# EAGLE board test1 (EAGLE 7.6.0)

Size 101.6 x 53.34 mm. Coordinates in mm from the lower left corner, seen from the top.
Outline: 0,0 0,53.34 96.52,53.34 99.06,50.8 99.06,40.64 101.6,38.1 101.6,3.81 99.06,1.27 99.06,0 0,0
Copper layers (1*16): Top 0.035mm / dielectric 1.5mm / Bottom 0.035mm
Design rules "default *": minimum track width 8mil, minimum drill 16mil, track to track 8mil, track to pad 8mil, pad to pad 8mil, via to via 10mil, smd to smd 8mil, copper to edge 40mil, drill to drill 12mil, minimum pad ring 10mil, minimum via ring 10mil, stop-mask expansion 4mil, vias tented up to drill 0mil, thermal gap 10mil
Net classes: 0 default: width 0.203 mm, drill 0.406 mm, clearance 0.203 mm; 1 power: width 0.61 mm, drill 0.711 mm, clearance 0.203 mm; 2 gnd: width 0.305 mm, drill 0.711 mm, clearance 0.203 mm; 3 usbvcc: width 0.508 mm, drill 0.711 mm, clearance 0.203 mm
Holes 3.2 mm at 15.24,2.54 15.24,50.8 90.17,50.8 96.52,2.54

## Footprints (pad centres in the part's own frame; a part is rotated, then mirrored left to right if it is on the bottom)
1X08 = drill 1.016 long: 1 -8.89,0; 2 -6.35,0; 3 -3.81,0; 4 -1.27,0; 5 1.27,0; 6 3.81,0; 7 6.35,0; 8 8.89,0
C0805RND = smd 1.3 x 1.5: 1 -0.977,0; 2 0.977,0
SMC_D = smd 2.4 x 2.8: + -3.15,0; - 3.15,0
SMB = smd 2.4 x 2.4: A 2.2,0; C -2.2,0
L1812 = smd 1.9 x 3.4: 1 -1.95,0; 2 1.95,0
TQFP100 = smd 1.5 x 0.35: 1 -8,6; 2 -8,5.5; 3 -8,5; 4 -8,4.5; 5 -8,4; 6 -8,3.5; 7 -8,3; 8 -8,2.5; 9 -8,2; 10 -8,1.5; 11 -8,1; 12 -8,0.5; 13 -8,0; 14 -8,-0.5; 15 -8,-1; 16 -8,-1.5; 17 -8,-2; 18 -8,-2.5; 19 -8,-3; 20 -8,-3.5; 21 -8,-4; 22 -8,-4.5; 23 -8,-5; 24 -8,-5.5; 25 -8,-6; 51 8,-6; 52 8,-5.5; 53 8,-5; 54 8,-4.5; 55 8,-4; 56 8,-3.5; 57 8,-3; 58 8,-2.5; 59 8,-2; 60 8,-1.5; 61 8,-1; 62 8,-0.5; 63 8,0; 64 8,0.5; 65 8,1; 66 8,1.5; 67 8,2; 68 8,2.5; 69 8,3; 70 8,3.5; 71 8,4; 72 8,4.5; 73 8,5; 74 8,5.5; 75 8,6 | smd 0.35 x 1.5: 26 -6,-8; 27 -5.5,-8; 28 -5,-8; 29 -4.5,-8; 30 -4,-8; 31 -3.5,-8; 32 -3,-8; 33 -2.5,-8; 34 -2,-8; 35 -1.5,-8; 36 -1,-8; 37 -0.5,-8; 38 0,-8; 39 0.5,-8; 40 1,-8; 41 1.5,-8; 42 2,-8; 43 2.5,-8; 44 3,-8; 45 3.5,-8; 46 4,-8; 47 4.5,-8; 48 5,-8; 49 5.5,-8; 50 6,-8; 76 6,8; 77 5.5,8; 78 5,8; 79 4.5,8; 80 4,8; 81 3.5,8; 82 3,8; 83 2.5,8; 84 2,8; 85 1.5,8; 86 1,8; 87 0.5,8; 88 0,8; 89 -0.5,8; 90 -1,8; 91 -1.5,8; 92 -2,8; 93 -2.5,8; 94 -3,8; 95 -3.5,8; 96 -4,8; 97 -4.5,8; 98 -5,8; 99 -5.5,8; 100 -6,8
DPACK = smd 1 x 1.6: 1 -2.28,-4.8; 3 2.28,-4.8 | smd 5.4 x 6.2: 2 0,2.5
SSOP28 = smd 0.381 x 1.499: 1 -4.225,-3.625; 2 -3.575,-3.625; 3 -2.925,-3.625; 4 -2.275,-3.625; 5 -1.625,-3.625; 6 -0.975,-3.625; 7 -0.325,-3.625; 8 0.325,-3.625; 9 0.975,-3.625; 10 1.625,-3.625; 11 2.275,-3.625; 12 2.925,-3.625; 13 3.575,-3.625; 14 4.225,-3.625; 15 4.225,3.625; 16 3.575,3.625; 17 2.925,3.625; 18 2.275,3.625; 19 1.625,3.625; 20 0.975,3.625; 21 0.325,3.625; 22 -0.325,3.625; 23 -0.975,3.625; 24 -1.625,3.625; 25 -2.275,3.625; 26 -2.925,3.625; 27 -3.575,3.625; 28 -4.225,3.625
SO08 = smd 0.6 x 2.2: 1 -1.905,-2.6; 2 -0.635,-2.6; 3 0.635,-2.6; 4 1.905,-2.6; 5 1.905,2.6; 6 0.635,2.6; 7 -0.635,2.6; 8 -1.905,2.6
2X03 = drill 1.016 octagon: 1 -2.54,-1.27; 2 -2.54,1.27; 3 0,-1.27; 4 0,1.27; 5 2.54,-1.27; 6 2.54,1.27
2X08 = drill 1.016 octagon: 1 -8.89,-1.27; 2 -8.89,1.27; 3 -6.35,-1.27; 4 -6.35,1.27; 5 -3.81,-1.27; 6 -3.81,1.27; 7 -1.27,-1.27; 8 -1.27,1.27; 9 1.27,-1.27; 10 1.27,1.27; 11 3.81,-1.27; 12 3.81,1.27; 13 6.35,-1.27; 14 6.35,1.27; 15 8.89,-1.27; 16 8.89,1.27
1X01 = drill 1.016 octagon: 1 0,0
0805RND = smd 1.27 x 1.27: P$1 -1.143,0; P$2 1.143,0
1X06 = drill 1.016 long: 1 -6.35,0; 2 -3.81,0; 3 -1.27,0; 4 1.27,0; 5 3.81,0; 6 6.35,0
HC49/S = drill 0.813: 1 -2.413,0; 2 2.413,0
R0805RND = smd 1.3 x 1.5: 1 -0.977,0; 2 0.977,0
RCL_0805RND = smd 1.27 x 1.27: P$1 -1.143,0; P$2 1.143,0
SJ = smd 1.168 x 1.6: 1 -0.762,0; 2 0.762,0
B3F-10XX = drill 1.016 long: 1 -3.251,2.261; 2 3.251,2.261; 3 -3.251,-2.261; 4 3.251,-2.261
SOT223 = smd 1.219 x 2.235: 1 -2.311,-3.099; 2 0,-3.099; 3 2.311,-3.099 | smd 3.6 x 2.2: 4 0,3.099
FIDUCIA-MOUNT = smd 1.016 x 1.016: P$1 0,0
DC-21MM = drill 3.302 pad 4.826 octagon: 1 -5.08,-3.353; 2 -0.076,-6.35; 3 -0.076,-0.356
JP4 = drill 0.914 long: 1 -3.81,0; 2 -1.27,0; 3 1.27,0; 4 3.81,0
PN61729 = drill 0.95 octagon: 1 1.25,4.71; 2 -1.25,4.71; 3 -1.25,2.71; 4 1.25,2.71 | drill 2.2: P$1 -6,0; P$2 6,0

## Placement (x,y rotation side)
ADCH  [1X08]  82.55,2.54 0 top
ADCL  [1X08]  59.69,2.54 0 top
C1  100n  [C0805RND]  64.77,18.41 0 top
C2  22p  [C0805RND]  38.61,9.65 0 top
C3  22p  [C0805RND]  38.61,12.19 0 top
C4  100n  [C0805RND]  26.42,44.2 0 top
C5  100n  [C0805RND]  16.26,18.8 0 top
C6  100u  [SMC_D]  22.86,6.1 270 top
C7  100u  [SMC_D]  28.45,6.1 270 top
C9  100n  [C0805RND]  64.39,37.47 180 top
C10  100n  [C0805RND]  38.61,7.11 0 top
C11  22p  [C0805RND]  26.42,16.26 0 top
C12  100n  [C0805RND]  26.42,21.23 180 top
C13  100n  [C0805RND]  21.34,16.26 180 top
C14  100n  [C0805RND]  16.26,26.42 0 top
C15  100n  [C0805RND]  15.24,46.23 0 top
C16  100n  [C0805RND]  19.81,46.23 0 top
C17  100n  [C0805RND]  21.34,26.42 0 top
COMMUNICATION  [1X08]  77.47,50.8 180 top
D1  [SMB]  17.27,9.14 270 top
F1  500mA  [L1812]  18.29,30.48 0 top
IC2  ATMEGA1280-16AU  [TQFP100]  50.8,28.35 0 top
IC4  MC33269D-5.0  [DPACK]  6.99,17.78 90 top
IC6  FT232RL  [SSOP28]  18.29,39.12 0 top
IC7  LM358D  [SO08]  18.8,22.61 270 top
ICSP  ICSP  [2X03]  64.9,27.94 270 top
JP1  [2X08]  95.25,39.37 90 top
JP2  [2X08]  95.25,19.05 90 top
JP3  [1X01]  93.98,50.8 0 top
JP4  [1X01]  96.52,50.8 0 top
JP5  [1X01]  93.98,7.62 0 top
JP6  [1X01]  96.52,7.62 0 top
L  [0805RND]  26.42,39.12 180 top
POWER  [1X06]  39.37,2.54 0 top
PWMH  [1X08]  33.02,50.8 180 top
PWML  [1X08]  54.61,50.8 180 top
PWR  [0805RND]  76.2,37.08 180 top
Q2  16MHz  [HC49/S]  43.18,13.21 90 top
R1  1K  [R0805RND]  26.42,41.66 180 top
R2  10k  [R0805RND]  80.77,37.08 180 top
R3  10k  [R0805RND]  80.77,39.62 180 top
R5  10K  [R0805RND]  26.42,18.8 0 top
R6  10k  [R0805RND]  21.34,18.8 180 top
R7  1k  [R0805RND]  26.42,36.58 0 top
R8  1K  [R0805RND]  80.77,34.54 180 top
R9  1k  [R0805RND]  26.42,28.96 0 top
R10  10k  [R0805RND]  16.26,16.26 180 top
R11  1K  [RCL_0805RND]  26.42,26.42 0 top
R12  1K  [RCL_0805RND]  26.42,23.88 0 top
RESET-EN  [SJ]  30.48,20.95 270 top
RX  [0805RND]  26.42,31.5 180 top
S1  [B3F-10XX]  74.17,27.94 180 top
T1  NDT2955  [SOT223]  7.11,27.43 90 top
TX  [0805RND]  26.42,34.04 180 top
U$1  FIDUCIALMOUNT  [FIDUCIA-MOUNT]  58.9,40.72 0 top
U$2  FIDUCIALMOUNT  [FIDUCIA-MOUNT]  36.7,17.65 0 top
U$3  FIDUCIALMOUNT  [FIDUCIA-MOUNT]  19.81,50.8 0 top
X2  DC21MMX  [DC-21MM]  5.33,8.38 90 top
X3  [JP4]  31.75,33.27 270 top
X4  [PN61729]  3.81,38.1 270 top

## Library data of the parts
ADCH ADCL COMMUNICATION ICSP JP1-JP6 POWER PWMH PWML = pinhead
C1-C7 C9-C17 F1 R1-R3 R5-R10 = rcl
D1 = diode
IC2 = atmel-2005
IC4 IC7 = linear
IC6 R11 R12 U$1-U$3 X4 = SmartPrj
L PWR RX TX = led
Q2 = crystal
RESET-EN X3 = jumper
S1 = switch-omron
T1 = zetex
X2 = powersupply

## Nets
+3V3 [power]: C15.2 IC6.17 IC7.2 POWER.2
+5V [usbvcc]: C1.1 C7.+ C9.1 C10.1 C16.1 C17.2 IC2.10 IC2.31 IC2.61 IC2.80 IC2.100 IC4.2 IC6.4 IC6.19 IC6.20 IC7.8 ICSP.2 JP3.1 JP4.1 POWER.3 R2.1 R3.1 R5.2 R7.2 R8.1 R9.2 T1.3
ADC0: ADCL.1 IC2.97
ADC1: ADCL.2 IC2.96
ADC2: ADCL.3 IC2.95
ADC3: ADCL.4 IC2.94
ADC4: ADCL.5 IC2.93
ADC5: ADCL.6 IC2.92
ADC6: ADCL.7 IC2.91
ADC7: ADCL.8 IC2.90
ADC8: ADCH.1 IC2.89
ADC9: ADCH.2 IC2.88
ADC10: ADCH.3 IC2.87
ADC11: ADCH.4 IC2.86
ADC12: ADCH.5 IC2.85
ADC13: ADCH.6 IC2.84
ADC14: ADCH.7 IC2.83
ADC15: ADCH.8 IC2.82
AREF: C4.1 IC2.98 PWMH.8
CMP: C13.2 IC7.3 R6.2 R10.1
CTS: IC6.11 X3.1
D+: IC6.15 X4.3
D-: IC6.16 X4.2
DCD: IC6.10 X3.3
DSR: IC6.9 X3.2
DTR: C12.1 IC6.2 RESET-EN.1 RESET-EN.2
GATE_CMD: IC7.6 IC7.7 T1.1
GND [gnd]: C1.2 C2.1 C3.1 C4.2 C5.2 C6.- C7.- C9.2 C10.2 C11.2 C13.1 C14.2 C15.1 C16.2 C17.1 IC2.11 IC2.32 IC2.62 IC2.81 IC2.99 IC4.1 IC6.7 IC6.18 IC6.21 IC6.25 IC6.26 IC7.4 ICSP.6 JP5.1 JP6.1 L.P$2 POWER.4 POWER.5 PWMH.7 PWR.P$2 R6.1 S1.1 S1.2 X2.1 X2.3 X4.4 X4.P$1 X4.P$2
M8RXD: IC6.1 R11.P$1
M8TXD: IC6.5 R12.P$1
N$2: L.P$1 R1.2
N$3: PWR.P$1 R8.2
N$4: IC7.1 IC7.5
N$6: C2.2 IC2.34 Q2.1
N$7: C3.2 IC2.33 Q2.2
N$15: IC6.23 RX.P$2
N$53: IC6.22 TX.P$2
N$54: R7.1 RX.P$1
N$55: R9.1 TX.P$1
N$60 [usbvcc]: F1.2 X4.1
PA0: IC2.78 JP1.16
PA1: IC2.77 JP1.15
PA2: IC2.76 JP1.14
PA3: IC2.75 JP1.13
PA4: IC2.74 JP1.12
PA5: IC2.73 JP1.11
PA6: IC2.72 JP1.10
PA7: IC2.71 JP1.9
PB0: IC2.19 JP2.1
PB1: IC2.20 ICSP.3 JP2.2
PB2: IC2.21 ICSP.4 JP2.3
PB3: IC2.22 ICSP.1 JP2.4
PB4: IC2.23 PWMH.3
PB5: IC2.24 PWMH.4
PB6: IC2.25 PWMH.5
PB7: IC2.26 PWMH.6 R1.1
PC0: IC2.53 JP1.1
PC1: IC2.54 JP1.2
PC2: IC2.55 JP1.3
PC3: IC2.56 JP1.4
PC4: IC2.57 JP1.5
PC5: IC2.58 JP1.6
PC6: IC2.59 JP1.7
PC7: IC2.60 JP1.8
PD7: IC2.50 JP2.16
PE0: IC2.2 PWML.1 R11.P$2
PE1: IC2.3 PWML.2 R12.P$2
PE3: IC2.5 PWML.6
PE4: IC2.6 PWML.3
PE5: IC2.7 PWML.4
PG0: IC2.51 JP2.13
PG1: IC2.52 JP2.14
PG2: IC2.70 JP2.15
PG5: IC2.1 PWML.5
PH3: IC2.15 PWML.7
PH4: IC2.16 PWML.8
PH5: IC2.17 PWMH.1
PH6: IC2.18 PWMH.2
PL0: IC2.35 JP2.5
PL1: IC2.36 JP2.6
PL2: IC2.37 JP2.7
PL3: IC2.38 JP2.8
PL4: IC2.39 JP2.9
PL5: IC2.40 JP2.10
PL6: IC2.41 JP2.11
PL7: IC2.42 JP2.12
PWRIN [power]: D1.A X2.2
RESET: C11.1 C12.2 IC2.30 ICSP.5 POWER.1 R5.1 S1.3 S1.4
RI: IC6.6 X3.4
RXD1: COMMUNICATION.3 IC2.45
RXD2: COMMUNICATION.5 IC2.12
RXD3: COMMUNICATION.7 IC2.63
SCL: COMMUNICATION.1 IC2.43 R2.2
SDA: COMMUNICATION.2 IC2.44 R3.2
TXD1: COMMUNICATION.4 IC2.46
TXD2: COMMUNICATION.6 IC2.13
TXD3: COMMUNICATION.8 IC2.64
USBVCC [usbvcc]: C14.1 F1.1 T1.2
VIN [power]: C5.1 C6.+ D1.C IC4.3 POWER.6 R10.2

## Tracks (layer width: path | path; a pad name or v marks a point on that pad's centre or on a via)
+3V3  (3 unrouted)
+5V  (26 unrouted)
ADC0  (1 unrouted)
ADC1  (1 unrouted)
ADC2  (1 unrouted)
ADC3  (1 unrouted)
ADC4  (1 unrouted)
ADC5  (1 unrouted)
ADC6  (1 unrouted)
ADC7  (1 unrouted)
ADC8  (1 unrouted)
ADC9  (1 unrouted)
ADC10  (1 unrouted)
ADC11  (1 unrouted)
ADC12  (1 unrouted)
ADC13  (1 unrouted)
ADC14  (1 unrouted)
ADC15  (1 unrouted)
AREF  (2 unrouted)
CMP  (3 unrouted)
CTS  (1 unrouted)
D+  (1 unrouted)
D-  (1 unrouted)
DCD  (1 unrouted)
DSR  (1 unrouted)
DTR  (3 unrouted)
GATE_CMD  (2 unrouted)
GND  (42 unrouted)
M8RXD  (1 unrouted)
M8TXD  (1 unrouted)
N$2  (1 unrouted)
N$3  (1 unrouted)
N$4  (1 unrouted)
N$6  (2 unrouted)
N$7  (2 unrouted)
N$15  (1 unrouted)
N$53  (1 unrouted)
N$54  (1 unrouted)
N$55  (1 unrouted)
N$60  (1 unrouted)
PA0  (1 unrouted)
PA1  (1 unrouted)
PA2  (1 unrouted)
PA3  (1 unrouted)
PA4  (1 unrouted)
PA5  (1 unrouted)
PA6  (1 unrouted)
PA7  (1 unrouted)
PB0  (1 unrouted)
PB1  (2 unrouted)
PB2  (2 unrouted)
PB3  (2 unrouted)
PB4  (1 unrouted)
PB5  (1 unrouted)
PB6  (1 unrouted)
PB7  (2 unrouted)
PC0  (1 unrouted)
PC1  (1 unrouted)
PC2  (1 unrouted)
PC3  (1 unrouted)
PC4  (1 unrouted)
PC5  (1 unrouted)
PC6  (1 unrouted)
PC7  (1 unrouted)
PD7  (1 unrouted)
PE0  (2 unrouted)
PE1  (2 unrouted)
PE3  (1 unrouted)
PE4  (1 unrouted)
PE5  (1 unrouted)
PG0  (1 unrouted)
PG1  (1 unrouted)
PG2  (1 unrouted)
PG5  (1 unrouted)
PH3  (1 unrouted)
PH4  (1 unrouted)
PH5  (1 unrouted)
PH6  (1 unrouted)
PL0  (1 unrouted)
PL1  (1 unrouted)
PL2  (1 unrouted)
PL3  (1 unrouted)
PL4  (1 unrouted)
PL5  (1 unrouted)
PL6  (1 unrouted)
PL7  (1 unrouted)
PWRIN  (1 unrouted)
RESET  (7 unrouted)
RI  (1 unrouted)
RXD1  (1 unrouted)
RXD2  (1 unrouted)
RXD3  (1 unrouted)
SCL  (2 unrouted)
SDA  (2 unrouted)
TXD1  (1 unrouted)
TXD2  (1 unrouted)
TXD3  (1 unrouted)
USBVCC  (2 unrouted)
VIN  (5 unrouted)